# EAGLE board stestickers (EAGLE 6.3)
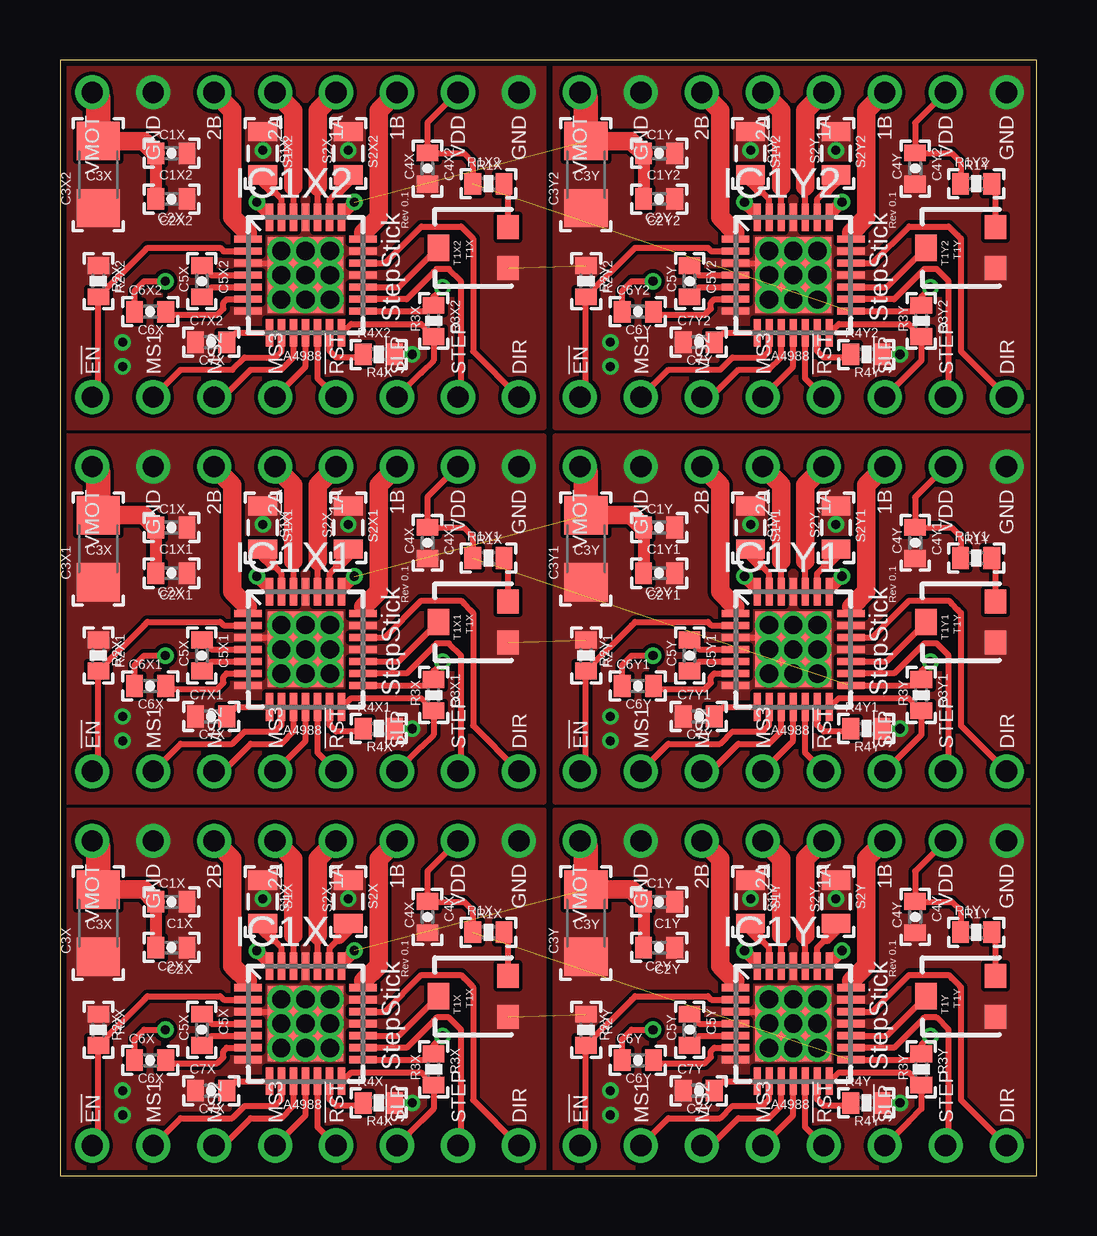
[diagram p0: board, top side]
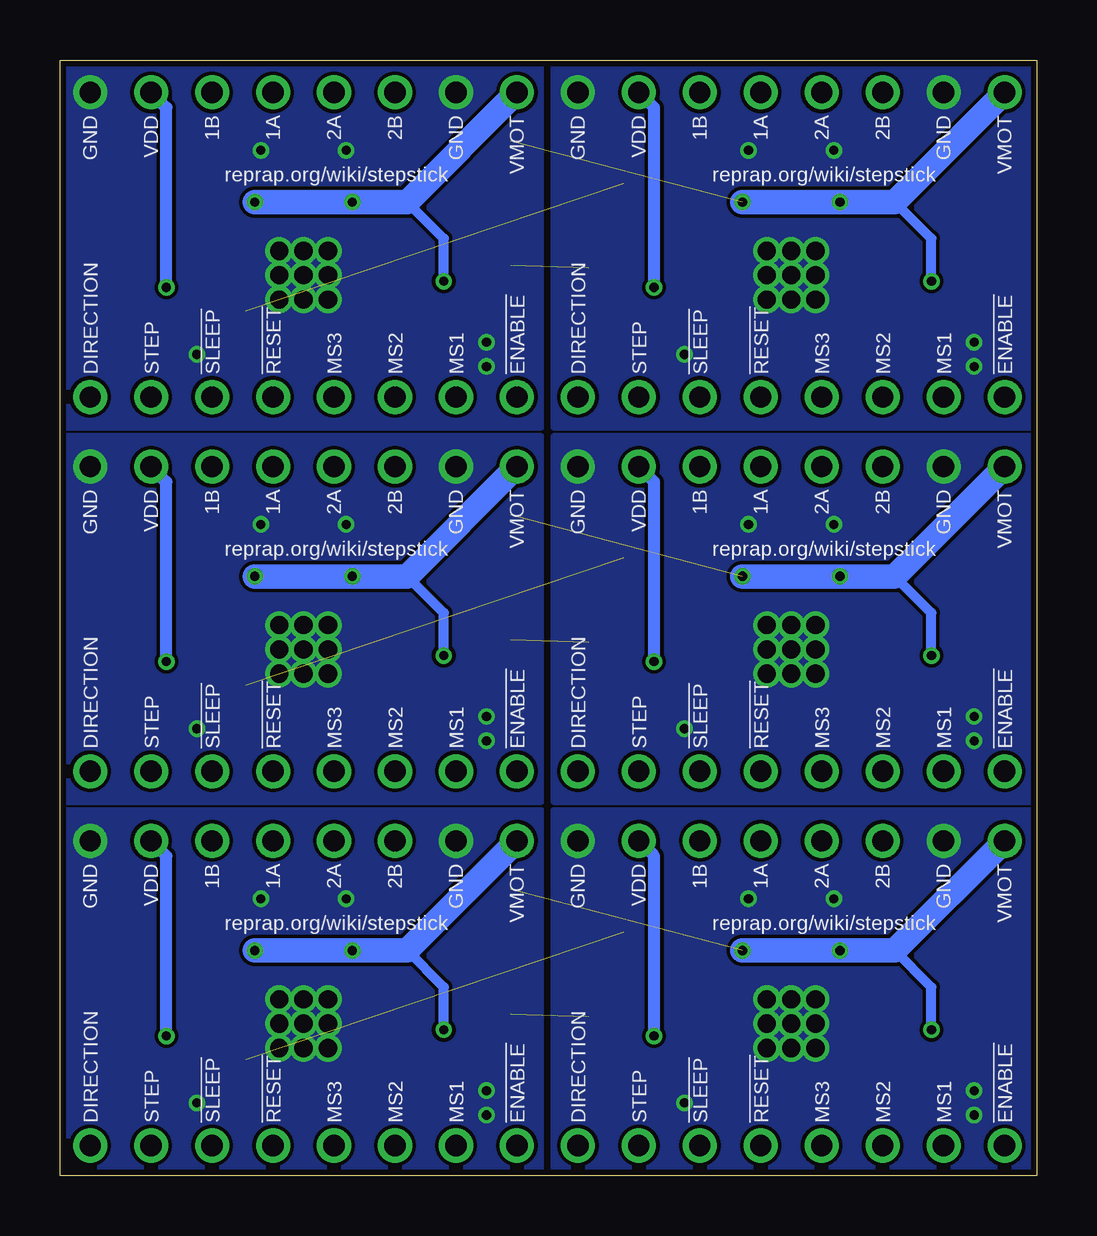
[diagram p1: board, bottom side, seen from below]

Size 40.7 x 46.5 mm. Coordinates in mm from the lower left corner, seen from the top.
Outline: 0,0 40.7,0 40.7,46.5 0,46.5 0,0
Copper layers (1*16): Top 0.035mm / dielectric 1.5mm / Bottom 0.035mm
Design rules "ITead_rule": minimum track width 6mil, minimum drill 12mil, track to track 6mil, track to pad 6mil, pad to pad 6mil, via to via 6mil, smd to smd 0mil, copper to edge 10mil, drill to drill 10mil, minimum pad ring 10mil, minimum via ring 6mil, stop-mask expansion 2mil, vias tented up to drill 100mil, thermal gap 10mil

## Footprints (pad centres in the part's own frame; a part is rotated, then mirrored left to right if it is on the bottom)
0402-CAP = smd 0.7 x 0.9: 1 -0.65,0; 2 0.65,0
1206 = smd 1.6 x 1.8: 1 -1.4,0; 2 1.4,0
QFN28ET = smd 1.15 x 0.3: 1 -2.4,1.5; 2 -2.4,1; 3 -2.4,0.5; 4 -2.4,0; 5 -2.4,-0.5; 6 -2.4,-1; 7 -2.4,-1.5; 15 2.4,-1.5; 16 2.4,-1; 17 2.4,-0.5; 18 2.4,0; 19 2.4,0.5; 20 2.4,1; 21 2.4,1.5 | smd 0.3 x 1.15: 8 -1.5,-2.4; 9 -1,-2.4; 10 -0.5,-2.4; 11 0,-2.4; 12 0.5,-2.4; 13 1,-2.4; 14 1.5,-2.4; 22 1.5,2.4; 23 1,2.4; 24 0.5,2.4; 25 0,2.4; 26 -0.5,2.4; 27 -1,2.4; 28 -1.5,2.4 | smd 3.15 x 3.15: EXP 0,0
CLONOLU = drill 0.889 pad 1.422: 1A 6.35,-1.27; 1B 6.35,-3.81; 2A 6.35,1.27; 2B 6.35,3.81; !EN -6.35,8.89; !RST -6.35,-1.27; !SLP -6.35,-3.81; DIR -6.35,-8.89; GND$1 6.35,6.35; GND$2 6.35,-8.89; MS1 -6.35,6.35; MS2 -6.35,3.81; MS3 -6.35,1.27; STEP -6.35,-6.35; VDD 6.35,-6.35; VMOT 6.35,8.89
0402-RES = smd 0.7 x 0.9: 1 -0.65,0; 2 0.65,0
0805 = smd 0.8 x 1.2: 1 -0.9,0; 2 0.9,0
TRIMPOT-3MM = smd 1 x 0.9: 1 -0.85,-1.45; 3 0.85,-1.45 | smd 1.1 x 0.9: 2 0,1.45

## Placement (x,y rotation side)
C1X  .1uf  [0402-CAP]  4.64,11.41 180 top
C1X1  .1uf  [0402-CAP]  4.64,27.01 180 top
C1X2  .1uf  [0402-CAP]  4.64,42.61 180 top
C1Y  .1uf  [0402-CAP]  24.96,11.41 180 top
C1Y1  .1uf  [0402-CAP]  24.96,27.01 180 top
C1Y2  .1uf  [0402-CAP]  24.96,42.61 180 top
C2X  .1uf  [0402-CAP]  4.64,9.51 180 top
C2X1  .1uf  [0402-CAP]  4.64,25.11 180 top
C2X2  .1uf  [0402-CAP]  4.64,40.7 180 top
C2Y  .1uf  [0402-CAP]  24.96,9.51 180 top
C2Y1  .1uf  [0402-CAP]  24.96,25.11 180 top
C2Y2  .1uf  [0402-CAP]  24.96,40.7 180 top
C3X  4.7uF  [1206]  1.6,10.52 90 top
C3X1  4.7uF  [1206]  1.6,26.12 90 top
C3X2  4.7uF  [1206]  1.6,41.72 90 top
C3Y  4.7uF  [1206]  21.92,10.52 90 top
C3Y1  4.7uF  [1206]  21.92,26.12 90 top
C3Y2  4.7uF  [1206]  21.92,41.72 90 top
C4X  .22uf  [0402-CAP]  15.31,10.78 270 top
C4X1  .22uf  [0402-CAP]  15.31,26.38 270 top
C4X2  .22uf  [0402-CAP]  15.31,41.98 270 top
C4Y  .22uf  [0402-CAP]  35.63,10.78 270 top
C4Y1  .22uf  [0402-CAP]  35.63,26.38 270 top
C4Y2  .22uf  [0402-CAP]  35.63,41.98 270 top
C5X  .1uf  [0402-CAP]  5.91,6.08 270 top
C5X1  .1uf  [0402-CAP]  5.91,21.68 270 top
C5X2  .1uf  [0402-CAP]  5.91,37.28 270 top
C5Y  .1uf  [0402-CAP]  26.23,6.08 270 top
C5Y1  .1uf  [0402-CAP]  26.23,21.68 270 top
C5Y2  .1uf  [0402-CAP]  26.23,37.28 270 top
C6X  .1uf  [0402-CAP]  3.76,4.81 0 top
C6X1  .1uf  [0402-CAP]  3.76,20.41 0 top
C6X2  .1uf  [0402-CAP]  3.76,36.01 0 top
C6Y  .1uf  [0402-CAP]  24.07,4.81 0 top
C6Y1  .1uf  [0402-CAP]  24.07,20.41 0 top
C6Y2  .1uf  [0402-CAP]  24.07,36.01 0 top
C7X  .22uf  [0402-CAP]  6.29,3.54 0 top
C7X1  .22uf  [0402-CAP]  6.29,19.14 0 top
C7X2  .22uf  [0402-CAP]  6.29,34.74 0 top
C7Y  .22uf  [0402-CAP]  26.61,3.54 0 top
C7Y1  .22uf  [0402-CAP]  26.61,19.14 0 top
C7Y2  .22uf  [0402-CAP]  26.61,34.74 0 top
IC1X  A4988  [QFN28ET]  10.23,6.33 0 top
IC1X1  A4988  [QFN28ET]  10.23,21.93 0 top
IC1X2  A4988  [QFN28ET]  10.23,37.53 0 top
IC1Y  A4988  [QFN28ET]  30.55,6.33 0 top
IC1Y1  A4988  [QFN28ET]  30.55,21.93 0 top
IC1Y2  A4988  [QFN28ET]  30.55,37.53 0 top
J1X  CLONOLU  [CLONOLU]  10.23,7.6 90 top
J1X1  CLONOLU  [CLONOLU]  10.23,23.2 90 top
J1X2  CLONOLU  [CLONOLU]  10.23,38.8 90 top
J1Y  CLONOLU  [CLONOLU]  30.55,7.6 90 top
J1Y1  CLONOLU  [CLONOLU]  30.55,23.2 90 top
J1Y2  CLONOLU  [CLONOLU]  30.55,38.8 90 top
R1X  20k  [0402-RES]  17.85,10.14 0 top
R1X1  20k  [0402-RES]  17.85,25.74 0 top
R1X2  20k  [0402-RES]  17.85,41.34 0 top
R1Y  20k  [0402-RES]  38.17,10.14 0 top
R1Y1  20k  [0402-RES]  38.17,25.74 0 top
R1Y2  20k  [0402-RES]  38.17,41.34 0 top
R2X  100k  [0402-RES]  1.6,6.08 270 top
R2X1  100k  [0402-RES]  1.6,21.68 270 top
R2X2  100k  [0402-RES]  1.6,37.28 270 top
R2Y  100k  [0402-RES]  21.92,6.08 270 top
R2Y1  100k  [0402-RES]  21.92,21.68 270 top
R2Y2  100k  [0402-RES]  21.92,37.28 270 top
R3X  100k  [0402-RES]  15.57,4.42 270 top
R3X1  100k  [0402-RES]  15.57,20.02 270 top
R3X2  100k  [0402-RES]  15.57,35.62 270 top
R3Y  100k  [0402-RES]  35.89,4.42 270 top
R3Y1  100k  [0402-RES]  35.89,20.02 270 top
R3Y2  100k  [0402-RES]  35.89,35.62 270 top
R4X  10k  [0402-RES]  13.28,3.03 0 top
R4X1  10k  [0402-RES]  13.28,18.63 0 top
R4X2  10k  [0402-RES]  13.28,34.23 0 top
R4Y  10k  [0402-RES]  33.6,3.03 0 top
R4Y1  10k  [0402-RES]  33.6,18.63 0 top
R4Y2  10k  [0402-RES]  33.6,34.23 0 top
S1X  0.2  [0805]  8.45,11.41 270 top
S1X1  0.2  [0805]  8.45,27.01 270 top
S1X2  0.2  [0805]  8.45,42.61 270 top
S1Y  0.2  [0805]  28.77,11.41 270 top
S1Y1  0.2  [0805]  28.77,27.01 270 top
S1Y2  0.2  [0805]  28.77,42.61 270 top
S2X  0.2  [0805]  12.01,11.41 270 top
S2X1  0.2  [0805]  12.01,27.01 270 top
S2X2  0.2  [0805]  12.01,42.61 270 top
S2Y  0.2  [0805]  32.33,11.41 270 top
S2Y1  0.2  [0805]  32.33,27.01 270 top
S2Y2  0.2  [0805]  32.33,42.61 270 top
T1X  TRIM  [TRIMPOT-3MM]  17.22,7.47 90 top
T1X1  TRIM  [TRIMPOT-3MM]  17.22,23.07 90 top
T1X2  TRIM  [TRIMPOT-3MM]  17.22,38.67 90 top
T1Y  TRIM  [TRIMPOT-3MM]  37.54,7.47 90 top
T1Y1  TRIM  [TRIMPOT-3MM]  37.54,23.07 90 top
T1Y2  TRIM  [TRIMPOT-3MM]  37.54,38.67 90 top

## Library data of the parts
C1X C1X1 C1X2 C1Y C1Y1 C1Y2 C2X C2X1 C2X2 C2Y C2Y1 C2Y2 C3X C3X1 C3X2 C3Y C3Y1 C3Y2 C4X C4X1 C4X2 C4Y C4Y1 C4Y2 C5X C5X1 C5X2 C5Y C5Y1 C5Y2 C6X C6X1 C6X2 C6Y C6Y1 C6Y2 C7X C7X1 C7X2 C7Y C7Y1 C7Y2 R1X R1X1 R1X2 R1Y R1Y1 R1Y2 R2X R2X1 R2X2 R2Y R2Y1 R2Y2 R3X R3X1 R3X2 R3Y R3Y1 R3Y2 R4X R4X1 R4X2 R4Y R4Y1 R4Y2 S1X S1X1 S1X2 S1Y S1Y1 S1Y2 S2X S2X1 S2X2 S2Y S2Y1 S2Y2 T1X T1X1 T1X2 T1Y T1Y1 T1Y2 = SparkFun
IC1X IC1X1 IC1X2 IC1Y IC1Y1 IC1Y2 = allegro; MPN: A4983SETTR-T; OC_FARNELL: 1688956; OC_NEWARK: 39M6763
J1X J1X1 J1X2 J1Y J1Y1 J1Y2 = pololu-allegro

## Nets
GND: C1X.1 C1Y.1 C2X.1 C2Y.1 C3X.1 C3Y.1 C4X.2 C4Y.2 C7X.1 C7Y.1 IC1X.3 IC1X.7 IC1X.18 IC1X.20 IC1X.25 IC1X.EXP IC1Y.3 IC1Y.7 IC1Y.18 IC1Y.20 IC1Y.25 IC1Y.EXP J1X.GND$1 J1X.GND$2 J1Y.GND$1 J1Y.GND$2 R2X.1 R2Y.1 R4X.2 R4Y.2 S1X.1 S1Y.1 S2X.1 S2Y.1 T1X.1 T1Y.1
GND1: C1X1.1 C1Y1.1 C2X1.1 C2Y1.1 C3X1.1 C3Y1.1 C4X1.2 C4Y1.2 C7X1.1 C7Y1.1 IC1X1.3 IC1X1.7 IC1X1.18 IC1X1.20 IC1X1.25 IC1X1.EXP IC1Y1.3 IC1Y1.7 IC1Y1.18 IC1Y1.20 IC1Y1.25 IC1Y1.EXP J1X1.GND$1 J1X1.GND$2 J1Y1.GND$1 J1Y1.GND$2 R2X1.1 R2Y1.1 R4X1.2 R4Y1.2 S1X1.1 S1Y1.1 S2X1.1 S2Y1.1 T1X1.1 T1Y1.1
GND2: C1X2.1 C1Y2.1 C2X2.1 C2Y2.1 C3X2.1 C3Y2.1 C4X2.2 C4Y2.2 C7X2.1 C7Y2.1 IC1X2.3 IC1X2.7 IC1X2.18 IC1X2.20 IC1X2.25 IC1X2.EXP IC1Y2.3 IC1Y2.7 IC1Y2.18 IC1Y2.20 IC1Y2.25 IC1Y2.EXP J1X2.GND$1 J1X2.GND$2 J1Y2.GND$1 J1Y2.GND$2 R2X2.1 R2Y2.1 R4X2.2 R4Y2.2 S1X2.1 S1Y2.1 S2X2.1 S2Y2.1 T1X2.1 T1Y2.1
VDD: C4X.1 C4Y.1 IC1X.15 IC1Y.15 J1X.VDD J1Y.VDD R1X.1 R1Y.1 R3X.1 R3Y.1
VDD1: C4X1.1 C4Y1.1 IC1X1.15 IC1Y1.15 J1X1.VDD J1Y1.VDD R1X1.1 R1Y1.1 R3X1.1 R3Y1.1
VDD2: C4X2.1 C4Y2.1 IC1X2.15 IC1Y2.15 J1X2.VDD J1Y2.VDD R1X2.1 R1Y2.1 R3X2.1 R3Y2.1
VMOT: C1X.2 C1Y.2 C2X.2 C2Y.2 C3X.2 C3Y.2 C6X.1 C6Y.1 IC1X.22 IC1X.28 IC1Y.22 IC1Y.28 J1X.VMOT J1Y.VMOT
VMOT1: C1X1.2 C1Y1.2 C2X1.2 C2Y1.2 C3X1.2 C3Y1.2 C6X1.1 C6Y1.1 IC1X1.22 IC1X1.28 IC1Y1.22 IC1Y1.28 J1X1.VMOT J1Y1.VMOT
VMOT2: C1X2.2 C1Y2.2 C2X2.2 C2Y2.2 C3X2.2 C3Y2.2 C6X2.1 C6Y2.1 IC1X2.22 IC1X2.28 IC1Y2.22 IC1Y2.28 J1X2.VMOT J1Y2.VMOT
XCP1: C5X.1 IC1X.4
XCP2: C5X.2 IC1X.5
XCP3: C5X1.1 IC1X1.4
XCP4: C5X1.2 IC1X1.5
XCP5: C5X2.1 IC1X2.4
XCP6: C5X2.2 IC1X2.5
XDIR: IC1X.19 J1X.DIR
XDIR1: IC1X1.19 J1X1.DIR
XDIR2: IC1X2.19 J1X2.DIR
XENABLE: IC1X.2 J1X.!EN R2X.2
XENABLE1: IC1X1.2 J1X1.!EN R2X1.2
XENABLE2: IC1X2.2 J1X2.!EN R2X2.2
XMS1: IC1X.9 J1X.MS1
XMS2: IC1X.10 J1X.MS2
XMS3: IC1X.11 J1X.MS3
XMS4: IC1X1.9 J1X1.MS1
XMS5: IC1X1.10 J1X1.MS2
XMS6: IC1X1.11 J1X1.MS3
XMS7: IC1X2.9 J1X2.MS1
XMS8: IC1X2.10 J1X2.MS2
XMS9: IC1X2.11 J1X2.MS3
XOUT1A: IC1X.24 J1X.1A
XOUT1A1: IC1X1.24 J1X1.1A
XOUT1A2: IC1X2.24 J1X2.1A
XOUT1B: IC1X.21 J1X.1B
XOUT1B1: IC1X1.21 J1X1.1B
XOUT1B2: IC1X2.21 J1X2.1B
XOUT2A: IC1X.26 J1X.2A
XOUT2A1: IC1X1.26 J1X1.2A
XOUT2A2: IC1X2.26 J1X2.2A
XOUT2B: IC1X.1 J1X.2B
XOUT2B1: IC1Y.1 J1Y.2B
XOUT2B2: IC1X1.1 J1X1.2B
XOUT2B3: IC1Y1.1 J1Y1.2B
XOUT2B4: IC1X2.1 J1X2.2B
XOUT2B5: IC1Y2.1 J1Y2.2B
XREF: IC1X.17 T1X.2
XREF1: IC1X1.17 T1X1.2
XREF2: R1X.2 T1X.3
XREF3: R1X1.2 T1X1.3
XREF4: IC1X2.17 T1X2.2
XREF5: R1X2.2 T1X2.3
XRESET: IC1X.12 J1X.!RST
XRESET1: IC1X1.12 J1X1.!RST
XRESET2: IC1X2.12 J1X2.!RST
XROSC: IC1X.13 R4X.1
XROSC1: IC1X1.13 R4X1.1
XROSC2: IC1X2.13 R4X2.1
XSENSE1: IC1X.23 S2X.2
XSENSE2: IC1X.27 S1X.2
XSENSE3: IC1X1.27 S1X1.2
XSENSE4: IC1X1.23 S2X1.2
XSENSE5: IC1X2.27 S1X2.2
XSENSE6: IC1X2.23 S2X2.2
XSLEEP: IC1X.14 J1X.!SLP R3X.2
XSLEEP1: IC1X1.14 J1X1.!SLP R3X1.2
XSLEEP2: IC1X2.14 J1X2.!SLP R3X2.2
XSTEP: IC1X.16 J1X.STEP
XSTEP1: IC1X1.16 J1X1.STEP
XSTEP2: IC1X2.16 J1X2.STEP
XVCP: C6X.2 IC1X.6
XVCP1: C6X1.2 IC1X1.6
XVCP2: C6X2.2 IC1X2.6
XVREG: C7X.2 IC1X.8
XVREG1: C7X1.2 IC1X1.8
XVREG2: C7X2.2 IC1X2.8
YCP1: C5Y.1 IC1Y.4
YCP2: C5Y.2 IC1Y.5
YCP3: C5Y1.1 IC1Y1.4
YCP4: C5Y1.2 IC1Y1.5
YCP5: C5Y2.1 IC1Y2.4
YCP6: C5Y2.2 IC1Y2.5
YDIR1: IC1Y.19 J1Y.DIR
YDIR2: IC1Y1.19 J1Y1.DIR
YDIR3: IC1Y2.19 J1Y2.DIR
YENABLE: IC1Y.2 J1Y.!EN R2Y.2
YENABLE1: IC1Y1.2 J1Y1.!EN R2Y1.2
YENABLE2: IC1Y2.2 J1Y2.!EN R2Y2.2
YMS1: IC1Y.9 J1Y.MS1
YMS2: IC1Y.10 J1Y.MS2
YMS3: IC1Y.11 J1Y.MS3
YMS4: IC1Y1.9 J1Y1.MS1
YMS5: IC1Y1.10 J1Y1.MS2
YMS6: IC1Y1.11 J1Y1.MS3
YMS7: IC1Y2.9 J1Y2.MS1
YMS8: IC1Y2.10 J1Y2.MS2
YMS9: IC1Y2.11 J1Y2.MS3
YOUT1A: IC1Y.24 J1Y.1A
YOUT1A1: IC1Y1.24 J1Y1.1A
YOUT1A2: IC1Y2.24 J1Y2.1A
YOUT1B: IC1Y.21 J1Y.1B
YOUT1B1: IC1Y1.21 J1Y1.1B
YOUT1B2: IC1Y2.21 J1Y2.1B
YOUT2A: IC1Y.26 J1Y.2A
YOUT2A1: IC1Y1.26 J1Y1.2A
YOUT2A2: IC1Y2.26 J1Y2.2A
YREF: IC1Y.17 T1Y.2
YREF1: R1Y.2 T1Y.3
YREF2: IC1Y1.17 T1Y1.2
YREF3: R1Y1.2 T1Y1.3
YREF4: IC1Y2.17 T1Y2.2
YREF5: R1Y2.2 T1Y2.3
YRESET: IC1Y.12 J1Y.!RST
YRESET1: IC1Y1.12 J1Y1.!RST
YRESET2: IC1Y2.12 J1Y2.!RST
YROSC: IC1Y.13 R4Y.1
YROSC1: IC1Y1.13 R4Y1.1
YROSC2: IC1Y2.13 R4Y2.1
YSENSE1: IC1Y.23 S2Y.2
YSENSE2: IC1Y.27 S1Y.2
YSENSE3: IC1Y1.27 S1Y1.2
YSENSE4: IC1Y1.23 S2Y1.2
YSENSE5: IC1Y2.27 S1Y2.2
YSENSE6: IC1Y2.23 S2Y2.2
YSLEEP: IC1Y.14 J1Y.!SLP R3Y.2
YSLEEP1: IC1Y1.14 J1Y1.!SLP R3Y1.2
YSLEEP2: IC1Y2.14 J1Y2.!SLP R3Y2.2
YSTEP: IC1Y.16 J1Y.STEP
YSTEP1: IC1Y1.16 J1Y1.STEP
YSTEP2: IC1Y2.16 J1Y2.STEP
YVCP: C6Y.2 IC1Y.6
YVCP1: C6Y1.2 IC1Y1.6
YVCP2: C6Y2.2 IC1Y2.6
YVREG: C7Y.2 IC1Y.8
YVREG1: C7Y1.2 IC1Y1.8
YVREG2: C7Y2.2 IC1Y2.8

## Tracks (layer width: path | path; a pad name or v marks a point on that pad's centre or on a via)
GND  (via drill 0.38, 0.76)  (1 unrouted)
  Top 0.254: IC1X.3 8.72,6.83 arc-90 v9.22,6.33 | IC1Y.3 29.04,6.83 arc-90 v29.54,6.33
  other vias: 8.45,11.54 12.01,11.54 10.23,7.35 9.22,7.35 11.25,7.35 11.25,5.31 9.22,5.31 10.23,6.33 11.25,6.33 10.23,5.31 14.68,3.03 2.61,2.52 28.77,11.54 32.33,11.54 30.55,7.35 29.54,7.35 31.57,7.35 31.57,5.31 29.54,5.31 30.55,6.33 31.57,6.33 30.55,5.31 35,3.03 2.61,3.54 22.93,2.52 22.93,3.54
  pour Top (rank 6, no thermals): 0.07,15.22 20.14,15.22 20.14,-0.02 0.07,-0.02
  pour Top (rank 6, no thermals): 20.65,15.22 40.46,15.22 40.46,-0.02 20.65,-0.02
  pour Bottom (rank 6, no thermals): 0.07,15.22 20.14,15.22 20.14,-0.02 0.07,-0.02
  pour Bottom (rank 6, no thermals): 20.65,15.22 40.46,15.22 40.46,-0.02 20.65,-0.02
GND1  (via drill 0.38, 0.76)  (1 unrouted)
  Top 0.254: IC1X1.3 8.72,22.43 arc-90 v9.22,21.93 | IC1Y1.3 29.04,22.43 arc-90 v29.54,21.93
  other vias: 8.45,27.14 12.01,27.14 10.23,22.95 9.22,22.95 11.25,22.95 11.25,20.91 9.22,20.91 10.23,21.93 11.25,21.93 10.23,20.91 14.68,18.63 2.61,18.12 28.77,27.14 32.33,27.14 30.55,22.95 29.54,22.95 31.57,22.95 31.57,20.91 29.54,20.91 30.55,21.93 31.57,21.93 30.55,20.91 35,18.63 2.61,19.14 22.93,18.12 22.93,19.14
  pour Top (rank 6, no thermals): 0.07,30.82 20.14,30.82 20.14,15.58 0.07,15.58
  pour Top (rank 6, no thermals): 20.65,30.82 40.46,30.82 40.46,15.58 20.65,15.58
  pour Bottom (rank 6, no thermals): 0.07,30.82 20.14,30.82 20.14,15.58 0.07,15.58
  pour Bottom (rank 6, no thermals): 20.65,30.82 40.46,30.82 40.46,15.58 20.65,15.58
GND2  (via drill 0.38, 0.76)  (1 unrouted)
  Top 0.254: IC1X2.3 8.72,38.03 arc-90 v9.22,37.53 | IC1Y2.3 29.04,38.03 arc-90 v29.54,37.53
  other vias: 8.45,42.74 12.01,42.74 10.23,38.55 9.22,38.55 11.25,38.55 11.25,36.51 9.22,36.51 10.23,37.53 11.25,37.53 10.23,36.51 14.68,34.23 2.61,33.72 28.77,42.74 32.33,42.74 30.55,38.55 29.54,38.55 31.57,38.55 31.57,36.51 29.54,36.51 30.55,37.53 31.57,37.53 30.55,36.51 35,34.23 2.61,34.74 22.93,33.72 22.93,34.74
  pour Top (rank 6, no thermals): 0.07,46.42 20.14,46.42 20.14,31.18 0.07,31.18
  pour Top (rank 6, no thermals): 20.65,46.42 40.46,46.42 40.46,31.18 20.65,31.18
  pour Bottom (rank 6, no thermals): 0.07,46.42 20.14,46.42 20.14,31.18 0.07,31.18
  pour Bottom (rank 6, no thermals): 20.65,46.42 40.46,46.42 40.46,31.18 20.65,31.18
VDD  (via drill 0.38)  (1 unrouted)
  Top 0.254: IC1X.15 15.32,4.83 R3X.1 15.57,5.44 v15.95,5.82 | R1X.1 17.2,11.04 16.84,11.41 15.33,11.41 C4X.1 15.31,12.68 J1X.VDD | IC1Y.15 35.64,4.83 R3Y.1 35.89,5.44 v36.27,5.82 | R1Y.1 37.52,11.04 37.16,11.41 35.65,11.41 C4Y.1 35.63,12.68 J1Y.VDD
  Bottom 0.508: v15.95,5.82 15.95,13.31 J1X.VDD | v36.27,5.82 36.27,13.31 J1Y.VDD
VDD1  (via drill 0.38)  (1 unrouted)
  Top 0.254: IC1X1.15 15.32,20.43 R3X1.1 15.57,21.04 v15.95,21.42 | R1X1.1 17.2,26.64 16.84,27.01 15.33,27.01 C4X1.1 15.31,28.28 J1X1.VDD | IC1Y1.15 35.64,20.43 R3Y1.1 35.89,21.04 v36.27,21.42 | R1Y1.1 37.52,26.64 37.16,27.01 35.65,27.01 C4Y1.1 35.63,28.28 J1Y1.VDD
  Bottom 0.508: v15.95,21.42 15.95,28.91 J1X1.VDD | v36.27,21.42 36.27,28.91 J1Y1.VDD
VDD2  (via drill 0.38)  (1 unrouted)
  Top 0.254: IC1X2.15 15.32,36.03 R3X2.1 15.57,36.64 v15.95,37.02 | R1X2.1 17.2,42.24 16.84,42.61 15.33,42.61 C4X2.1 15.31,43.88 J1X2.VDD | IC1Y2.15 35.64,36.03 R3Y2.1 35.89,36.64 v36.27,37.02 | R1Y2.1 37.52,42.24 37.16,42.61 35.65,42.61 C4Y2.1 35.63,43.88 J1Y2.VDD
  Bottom 0.508: v15.95,37.02 15.95,44.52 J1X2.VDD | v36.27,37.02 36.27,44.52 J1Y2.VDD
VMOT  (via drill 0.38)  (1 unrouted)
  Top 0.254: 8.58,9 8.72,8.74 IC1X.28 | 11.88,9 11.75,8.74 IC1X.22 | C6X.1 3.1,5.68 3.5,6.08 v4.39,6.08 | 28.9,9 29.04,8.74 IC1Y.28 | 32.2,9 32.06,8.74 IC1Y.22 | C6Y.1 23.42,5.68 23.82,6.08 v24.71,6.08
  Top 0.508: v8.2,9.38 8.58,9 | v12.26,9.38 11.88,9 | C1X.2 C2X.2 4.01,9.49 | v28.52,9.38 28.9,9 | v32.58,9.38 32.2,9 | C1Y.2 C2Y.2 24.33,9.49
  Top 0.762: C1X.2 3.48,11.92 C3X.2 | C1Y.2 23.8,11.92 C3Y.2
  Top 1.016: C3Y.2 21.92,13.7 J1Y.VMOT | C3X.2 1.6,13.7 J1X.VMOT
  Bottom 0.406: v4.39,6.08 4.39,7.85 5.91,9.38 | v24.71,6.08 24.71,7.85 26.23,9.38
  Bottom 1.016: v12.26,9.38 v8.2,9.38 5.91,9.38 J1X.VMOT | v32.58,9.38 v28.52,9.38 26.23,9.38 J1Y.VMOT
VMOT1  (via drill 0.38)  (1 unrouted)
  Top 0.254: 8.58,24.6 8.72,24.34 IC1X1.28 | 11.88,24.6 11.75,24.34 IC1X1.22 | C6X1.1 3.1,21.28 3.5,21.68 v4.39,21.68 | 28.9,24.6 29.04,24.34 IC1Y1.28 | 32.2,24.6 32.06,24.34 IC1Y1.22 | C6Y1.1 23.42,21.28 23.82,21.68 v24.71,21.68
  Top 0.508: v8.2,24.98 8.58,24.6 | v12.26,24.98 11.88,24.6 | C1X1.2 C2X1.2 4.01,25.09 | v28.52,24.98 28.9,24.6 | v32.58,24.98 32.2,24.6 | C1Y1.2 C2Y1.2 24.33,25.09
  Top 0.762: C1X1.2 3.48,27.52 C3X1.2 | C1Y1.2 23.8,27.52 C3Y1.2
  Top 1.016: C3Y1.2 21.92,29.3 J1Y1.VMOT | C3X1.2 1.6,29.3 J1X1.VMOT
  Bottom 0.406: v4.39,21.68 4.39,23.45 5.91,24.98 | v24.71,21.68 24.71,23.45 26.23,24.98
  Bottom 1.016: v12.26,24.98 v8.2,24.98 5.91,24.98 J1X1.VMOT | v32.58,24.98 v28.52,24.98 26.23,24.98 J1Y1.VMOT
VMOT2  (via drill 0.38)  (1 unrouted)
  Top 0.254: 8.58,40.2 8.72,39.94 IC1X2.28 | 11.88,40.2 11.75,39.94 IC1X2.22 | C6X2.1 3.1,36.88 3.5,37.28 v4.39,37.28 | 28.9,40.2 29.04,39.94 IC1Y2.28 | 32.2,40.2 32.06,39.94 IC1Y2.22 | C6Y2.1 23.42,36.88 23.82,37.28 v24.71,37.28
  Top 0.508: v8.2,40.58 8.58,40.2 | v12.26,40.58 11.88,40.2 | C1X2.2 C2X2.2 4.01,40.69 | v28.52,40.58 28.9,40.2 | v32.58,40.58 32.2,40.2 | C1Y2.2 C2Y2.2 24.33,40.69
  Top 0.762: C1X2.2 3.48,43.12 C3X2.2 | C1Y2.2 23.8,43.12 C3Y2.2
  Top 1.016: C3Y2.2 21.92,44.9 J1Y2.VMOT | C3X2.2 1.6,44.9 J1X2.VMOT
  Bottom 0.406: v4.39,37.28 4.39,39.05 5.91,40.58 | v24.71,37.28 24.71,39.05 26.23,40.58
  Bottom 1.016: v12.26,40.58 v8.2,40.58 5.91,40.58 J1X2.VMOT | v32.58,40.58 v28.52,40.58 26.23,40.58 J1Y2.VMOT
XCP1
  Top 0.254: IC1X.4 6.31,6.33 C5X.1
XCP2
  Top 0.254: IC1X.5 6.94,5.83 6.93,5.82 6.31,5.82 C5X.2
XCP3
  Top 0.254: IC1X1.4 6.31,21.93 C5X1.1
XCP4
  Top 0.254: IC1X1.5 6.94,21.43 6.93,21.42 6.31,21.42 C5X1.2
XCP5
  Top 0.254: IC1X2.4 6.31,37.53 C5X2.1
XCP6
  Top 0.254: IC1X2.5 6.94,37.03 6.93,37.02 6.31,37.02 C5X2.2
XDIR
  Top 0.254: IC1X.19 13.53,6.83 15.06,8.36 16.71,8.36 16.84,8.23 17.09,7.98 17.22,7.85 17.22,3.15 J1X.DIR
XDIR1
  Top 0.254: IC1X1.19 13.53,22.43 15.06,23.96 16.71,23.96 16.84,23.84 17.09,23.58 17.22,23.45 17.22,18.75 J1X1.DIR
XDIR2
  Top 0.254: IC1X2.19 13.53,38.03 15.06,39.56 16.71,39.56 16.84,39.44 17.09,39.18 17.22,39.05 17.22,34.35 J1X2.DIR
XENABLE
  Top 0.254: J1X.!EN 1.6,1.5 R2X.2 3.5,7.33 3.64,7.47 6.68,7.47 6.82,7.33 IC1X.2
XENABLE1
  Top 0.254: J1X1.!EN 1.6,17.1 R2X1.2 3.5,22.93 3.64,23.07 6.68,23.07 6.82,22.93 IC1X1.2
XENABLE2
  Top 0.254: J1X2.!EN 1.6,32.7 R2X2.2 3.5,38.53 3.64,38.67 6.68,38.67 6.82,38.53 IC1X2.2
XMS1
  Top 0.254: IC1X.9 9.23,3.17 8.96,2.9 7.69,2.9 7.18,2.39 5.03,2.39 J1X.MS1
XMS2
  Top 0.254: J1X.MS2 6.8,1.25 7.95,2.39 9.22,2.39 9.72,2.9 9.73,2.91 IC1X.10
XMS3
  Top 0.254: J1X.MS3 10.23,2.52 IC1X.11
XMS4
  Top 0.254: IC1X1.9 9.23,18.77 8.96,18.5 7.69,18.5 7.18,17.99 5.03,17.99 J1X1.MS1
XMS5
  Top 0.254: J1X1.MS2 6.8,16.85 7.95,17.99 9.22,17.99 9.72,18.5 9.73,18.51 IC1X1.10
XMS6
  Top 0.254: J1X1.MS3 10.23,18.12 IC1X1.11
XMS7
  Top 0.254: IC1X2.9 9.23,34.37 8.96,34.1 7.69,34.1 7.18,33.59 5.03,33.59 J1X2.MS1
XMS8
  Top 0.254: J1X2.MS2 6.8,32.45 7.95,33.59 9.22,33.59 9.72,34.1 9.73,34.11 IC1X2.10
XMS9
  Top 0.254: J1X2.MS3 10.23,33.72 IC1X2.11
XOUT1A
  Top 0.254: IC1X.24 10.73,9.88 10.74,10.01
  Top 0.762: J1X.1A 10.74,13.19 10.74,10.01
XOUT1A1
  Top 0.254: IC1X1.24 10.73,25.48 10.74,25.61
  Top 0.762: J1X1.1A 10.74,28.79 10.74,25.61
XOUT1A2
  Top 0.254: IC1X2.24 10.73,41.08 10.74,41.21
  Top 0.762: J1X2.1A 10.74,44.39 10.74,41.21
XOUT1B
  Top 0.254: 12.64,8.11 12.64,7.84 IC1X.21
  Top 0.762: J1X.1B 13.28,13.19 13.28,8.74 12.64,8.11
XOUT1B1
  Top 0.254: 12.64,23.71 12.64,23.44 IC1X1.21
  Top 0.762: J1X1.1B 13.28,28.79 13.28,24.34 12.64,23.71
XOUT1B2
  Top 0.254: 12.64,39.31 12.64,39.04 IC1X2.21
  Top 0.762: J1X2.1B 13.28,44.39 13.28,39.94 12.64,39.31
XOUT2A
  Top 0.254: IC1X.26 9.73,9.88 9.72,10.01
  Top 0.762: J1X.2A 9.72,13.19 9.72,10.01
XOUT2A1
  Top 0.254: IC1X1.26 9.73,25.48 9.72,25.61
  Top 0.762: J1X1.2A 9.72,28.79 9.72,25.61
XOUT2A2
  Top 0.254: IC1X2.26 9.73,41.08 9.72,41.21
  Top 0.762: J1X2.2A 9.72,44.39 9.72,41.21
XOUT2B
  Top 0.254: 7.82,8.11 7.82,7.84 IC1X.1
  Top 0.762: J1X.2B 7.18,13.19 7.18,8.74 7.82,8.11
XOUT2B1
  Top 0.254: 28.14,8.11 28.14,7.84 IC1Y.1
  Top 0.762: J1Y.2B 27.5,13.19 27.5,8.74 28.14,8.11
XOUT2B2
  Top 0.254: 7.82,23.71 7.82,23.44 IC1X1.1
  Top 0.762: J1X1.2B 7.18,28.79 7.18,24.34 7.82,23.71
XOUT2B3
  Top 0.254: 28.14,23.71 28.14,23.44 IC1Y1.1
  Top 0.762: J1Y1.2B 27.5,28.79 27.5,24.34 28.14,23.71
XOUT2B4
  Top 0.254: 7.82,39.31 7.82,39.04 IC1X2.1
  Top 0.762: J1X2.2B 7.18,44.39 7.18,39.94 7.82,39.31
XOUT2B5
  Top 0.254: 28.14,39.31 28.14,39.04 IC1Y2.1
  Top 0.762: J1Y2.2B 27.5,44.39 27.5,39.94 28.14,39.31
XREF
  Top 0.254: IC1X.17 14.12,5.83 T1X.2
XREF1
  Top 0.254: IC1X1.17 14.12,21.43 T1X1.2
XREF2
  Top 0.254: T1X.3 18.67,9.97 R1X.2
XREF3
  Top 0.254: T1X1.3 18.67,25.57 R1X1.2
XREF4
  Top 0.254: IC1X2.17 14.12,37.03 T1X2.2
XREF5
  Top 0.254: T1X2.3 18.67,41.17 R1X2.2
XRESET
  Top 0.254: J1X.!RST 10.73,2.02 IC1X.12
XRESET1
  Top 0.254: J1X1.!RST 10.73,17.62 IC1X1.12
XRESET2
  Top 0.254: J1X2.!RST 10.73,33.22 IC1X2.12
XROSC
  Top 0.254: IC1X.13 11.23,3.17 11.5,2.9 12.5,2.9 R4X.1
XROSC1
  Top 0.254: IC1X1.13 11.23,18.77 11.5,18.5 12.5,18.5 R4X1.1
XROSC2
  Top 0.254: IC1X2.13 11.23,34.37 11.5,34.1 12.5,34.1 R4X2.1
XSENSE1
  Top 0.254: IC1X.23 11.23,9.49 11.63,9.89
  Top 0.508: 11.63,9.89 12.01,10.27 S2X.2
XSENSE2
  Top 0.254: IC1X.27 9.23,9.49 8.84,9.89
  Top 0.508: 8.84,9.89 8.45,10.27 S1X.2
XSENSE3
  Top 0.254: IC1X1.27 9.23,25.09 8.84,25.49
  Top 0.508: 8.84,25.49 8.45,25.87 S1X1.2
XSENSE4
  Top 0.254: IC1X1.23 11.23,25.09 11.63,25.49
  Top 0.508: 11.63,25.49 12.01,25.87 S2X1.2
XSENSE5
  Top 0.254: IC1X2.27 9.23,40.69 8.84,41.09
  Top 0.508: 8.84,41.09 8.45,41.47 S1X2.2
XSENSE6
  Top 0.254: IC1X2.23 11.23,40.69 11.63,41.09
  Top 0.508: 11.63,41.09 12.01,41.47 S2X2.2
XSLEEP
  Top 0.254: J1X.!SLP 15.06,2.27 15.57,2.77 R3X.2 15.04,4.3 12.14,4.3 11.77,3.93 IC1X.14
XSLEEP1
  Top 0.254: J1X1.!SLP 15.06,17.87 15.57,18.37 R3X1.2 15.04,19.9 12.14,19.9 11.77,19.53 IC1X1.14
XSLEEP2
  Top 0.254: J1X2.!SLP 15.06,33.47 15.57,33.97 R3X2.2 15.04,35.5 12.14,35.5 11.77,35.13 IC1X2.14
XSTEP
  Top 0.254: IC1X.16 14.44,5.33 15.57,6.46 15.69,6.58 16.2,6.58 16.71,6.08 16.71,5.95 16.71,1.38 J1X.STEP
XSTEP1
  Top 0.254: IC1X1.16 14.44,20.93 15.57,22.06 15.69,22.18 16.2,22.18 16.71,21.68 16.71,21.55 16.71,16.98 J1X1.STEP
XSTEP2
  Top 0.254: IC1X2.16 14.44,36.53 15.57,37.66 15.69,37.78 16.2,37.78 16.71,37.28 16.71,37.15 16.71,32.58 J1X2.STEP
XVCP
  Top 0.254: IC1X.6 6.95,5.33 6.8,5.19 6.8,4.93 6.55,4.68 4.53,4.68 C6X.2
XVCP1
  Top 0.254: IC1X1.6 6.95,20.93 6.8,20.79 6.8,20.53 6.55,20.28 4.53,20.28 C6X1.2
XVCP2
  Top 0.254: IC1X2.6 6.95,36.53 6.8,36.39 6.8,36.13 6.55,35.88 4.53,35.88 C6X2.2
XVREG
  Top 0.254: IC1X.8 7.34,3.93 C7X.2
XVREG1
  Top 0.254: IC1X1.8 7.34,19.53 C7X1.2
XVREG2
  Top 0.254: IC1X2.8 7.34,35.13 C7X2.2
YCP1
  Top 0.254: IC1Y.4 26.63,6.33 C5Y.1
YCP2
  Top 0.254: IC1Y.5 27.26,5.83 27.25,5.82 26.63,5.82 C5Y.2
YCP3
  Top 0.254: IC1Y1.4 26.63,21.93 C5Y1.1
YCP4
  Top 0.254: IC1Y1.5 27.26,21.43 27.25,21.42 26.63,21.42 C5Y1.2
YCP5
  Top 0.254: IC1Y2.4 26.63,37.53 C5Y2.1
YCP6
  Top 0.254: IC1Y2.5 27.26,37.03 27.25,37.02 26.63,37.02 C5Y2.2
YDIR1
  Top 0.254: IC1Y.19 33.85,6.83 35.38,8.36 37.03,8.36 37.16,8.23 37.41,7.98 37.54,7.85 37.54,3.15 J1Y.DIR
YDIR2
  Top 0.254: IC1Y1.19 33.85,22.43 35.38,23.96 37.03,23.96 37.16,23.84 37.41,23.58 37.54,23.45 37.54,18.75 J1Y1.DIR
YDIR3
  Top 0.254: IC1Y2.19 33.85,38.03 35.38,39.56 37.03,39.56 37.16,39.44 37.41,39.18 37.54,39.05 37.54,34.35 J1Y2.DIR
YENABLE
  Top 0.254: J1Y.!EN 21.92,1.5 R2Y.2 23.82,7.33 23.96,7.47 27,7.47 27.14,7.33 IC1Y.2
YENABLE1
  Top 0.254: J1Y1.!EN 21.92,17.1 R2Y1.2 23.82,22.93 23.96,23.07 27,23.07 27.14,22.93 IC1Y1.2
YENABLE2
  Top 0.254: J1Y2.!EN 21.92,32.7 R2Y2.2 23.82,38.53 23.96,38.67 27,38.67 27.14,38.53 IC1Y2.2
YMS1
  Top 0.254: IC1Y.9 29.55,3.17 29.28,2.9 28.01,2.9 27.5,2.39 25.34,2.39 J1Y.MS1
YMS2
  Top 0.254: J1Y.MS2 27.12,1.25 28.27,2.39 29.54,2.39 30.04,2.9 30.05,2.91 IC1Y.10
YMS3
  Top 0.254: J1Y.MS3 30.55,2.52 IC1Y.11
YMS4
  Top 0.254: IC1Y1.9 29.55,18.77 29.28,18.5 28.01,18.5 27.5,17.99 25.34,17.99 J1Y1.MS1
YMS5
  Top 0.254: J1Y1.MS2 27.12,16.85 28.27,17.99 29.54,17.99 30.04,18.5 30.05,18.51 IC1Y1.10
YMS6
  Top 0.254: J1Y1.MS3 30.55,18.12 IC1Y1.11
YMS7
  Top 0.254: IC1Y2.9 29.55,34.37 29.28,34.1 28.01,34.1 27.5,33.59 25.34,33.59 J1Y2.MS1
YMS8
  Top 0.254: J1Y2.MS2 27.12,32.45 28.27,33.59 29.54,33.59 30.04,34.1 30.05,34.11 IC1Y2.10
YMS9
  Top 0.254: J1Y2.MS3 30.55,33.72 IC1Y2.11
YOUT1A
  Top 0.254: IC1Y.24 31.05,9.88 31.06,10.01
  Top 0.762: J1Y.1A 31.06,13.19 31.06,10.01
YOUT1A1
  Top 0.254: IC1Y1.24 31.05,25.48 31.06,25.61
  Top 0.762: J1Y1.1A 31.06,28.79 31.06,25.61
YOUT1A2
  Top 0.254: IC1Y2.24 31.05,41.08 31.06,41.21
  Top 0.762: J1Y2.1A 31.06,44.39 31.06,41.21
YOUT1B
  Top 0.254: 32.96,8.11 32.96,7.84 IC1Y.21
  Top 0.762: J1Y.1B 33.6,13.19 33.6,8.74 32.96,8.11
YOUT1B1
  Top 0.254: 32.96,23.71 32.96,23.44 IC1Y1.21
  Top 0.762: J1Y1.1B 33.6,28.79 33.6,24.34 32.96,23.71
YOUT1B2
  Top 0.254: 32.96,39.31 32.96,39.04 IC1Y2.21
  Top 0.762: J1Y2.1B 33.6,44.39 33.6,39.94 32.96,39.31
YOUT2A
  Top 0.254: IC1Y.26 30.05,9.88 30.04,10.01
  Top 0.762: J1Y.2A 30.04,13.19 30.04,10.01
YOUT2A1
  Top 0.254: IC1Y1.26 30.05,25.48 30.04,25.61
  Top 0.762: J1Y1.2A 30.04,28.79 30.04,25.61
YOUT2A2
  Top 0.254: IC1Y2.26 30.05,41.08 30.04,41.21
  Top 0.762: J1Y2.2A 30.04,44.39 30.04,41.21
YREF
  Top 0.254: IC1Y.17 34.44,5.83 T1Y.2
YREF1
  Top 0.254: T1Y.3 38.99,9.97 R1Y.2
YREF2
  Top 0.254: IC1Y1.17 34.44,21.43 T1Y1.2
YREF3
  Top 0.254: T1Y1.3 38.99,25.57 R1Y1.2
YREF4
  Top 0.254: IC1Y2.17 34.44,37.03 T1Y2.2
YREF5
  Top 0.254: T1Y2.3 38.99,41.17 R1Y2.2
YRESET
  Top 0.254: J1Y.!RST 31.05,2.02 IC1Y.12
YRESET1
  Top 0.254: J1Y1.!RST 31.05,17.62 IC1Y1.12
YRESET2
  Top 0.254: J1Y2.!RST 31.05,33.22 IC1Y2.12
YROSC
  Top 0.254: IC1Y.13 31.55,3.17 31.82,2.9 32.82,2.9 R4Y.1
YROSC1
  Top 0.254: IC1Y1.13 31.55,18.77 31.82,18.5 32.82,18.5 R4Y1.1
YROSC2
  Top 0.254: IC1Y2.13 31.55,34.37 31.82,34.1 32.82,34.1 R4Y2.1
YSENSE1
  Top 0.254: IC1Y.23 31.55,9.49 31.95,9.89
  Top 0.508: 31.95,9.89 32.33,10.27 S2Y.2
YSENSE2
  Top 0.254: IC1Y.27 29.55,9.49 29.15,9.89
  Top 0.508: 29.15,9.89 28.77,10.27 S1Y.2
YSENSE3
  Top 0.254: IC1Y1.27 29.55,25.09 29.15,25.49
  Top 0.508: 29.15,25.49 28.77,25.87 S1Y1.2
YSENSE4
  Top 0.254: IC1Y1.23 31.55,25.09 31.95,25.49
  Top 0.508: 31.95,25.49 32.33,25.87 S2Y1.2
YSENSE5
  Top 0.254: IC1Y2.27 29.55,40.69 29.15,41.09
  Top 0.508: 29.15,41.09 28.77,41.47 S1Y2.2
YSENSE6
  Top 0.254: IC1Y2.23 31.55,40.69 31.95,41.09
  Top 0.508: 31.95,41.09 32.33,41.47 S2Y2.2
YSLEEP
  Top 0.254: J1Y.!SLP 35.38,2.27 35.89,2.77 R3Y.2 35.36,4.3 32.46,4.3 32.09,3.93 IC1Y.14
YSLEEP1
  Top 0.254: J1Y1.!SLP 35.38,17.87 35.89,18.37 R3Y1.2 35.36,19.9 32.46,19.9 32.09,19.53 IC1Y1.14
YSLEEP2
  Top 0.254: J1Y2.!SLP 35.38,33.47 35.89,33.97 R3Y2.2 35.36,35.5 32.46,35.5 32.09,35.13 IC1Y2.14
YSTEP
  Top 0.254: IC1Y.16 34.76,5.33 35.89,6.46 36.01,6.58 36.52,6.58 37.03,6.08 37.03,5.95 37.03,1.38 J1Y.STEP
YSTEP1
  Top 0.254: IC1Y1.16 34.76,20.93 35.89,22.06 36.01,22.18 36.52,22.18 37.03,21.68 37.03,21.55 37.03,16.98 J1Y1.STEP
YSTEP2
  Top 0.254: IC1Y2.16 34.76,36.53 35.89,37.66 36.01,37.78 36.52,37.78 37.03,37.28 37.03,37.15 37.03,32.58 J1Y2.STEP
YVCP
  Top 0.254: IC1Y.6 27.27,5.33 27.12,5.19 27.12,4.93 26.87,4.68 24.85,4.68 C6Y.2
YVCP1
  Top 0.254: IC1Y1.6 27.27,20.93 27.12,20.79 27.12,20.53 26.87,20.28 24.85,20.28 C6Y1.2
YVCP2
  Top 0.254: IC1Y2.6 27.27,36.53 27.12,36.39 27.12,36.13 26.87,35.88 24.85,35.88 C6Y2.2
YVREG
  Top 0.254: IC1Y.8 27.66,3.93 C7Y.2
YVREG1
  Top 0.254: IC1Y1.8 27.66,19.53 C7Y1.2
YVREG2
  Top 0.254: IC1Y2.8 27.66,35.13 C7Y2.2

## Text on the board
_tsilk: C1X | S1X | S2X | C4X | C1Y | S1Y | S2Y | C4Y | R1X | R1Y | C3X | Rev 0.1 | C3Y | Rev 0.1 | C2X | C2Y | R2X | C5X | T1X | R2Y | C5Y | T1Y | StepStick | R3X | StepStick | R3Y | C6X | C6Y | C7X | A4988 | C7Y | A4988 | R4X | R4Y | C1X | S1X | S2X | C1Y | S1Y | S2Y | C4X | C4Y | C3X | R1X | C3Y | R1Y | C2X | Rev 0.1 | C2Y | Rev 0.1 | T1X | T1Y | R2X | C5X | R2Y | C5Y | R3X | R3Y | StepStick | StepStick | C6X | C6Y | C7X | A4988 | R4X | C7Y | A4988 | R4Y | C1X | S1X | S2X | C1Y | S1Y | S2Y | C4X | R1X | C4Y | R1Y | C3X | Rev 0.1 | C3Y | Rev 0.1 | C2X | C2Y | R2X | C5X | T1X | R2Y | C5Y | T1Y | R3X | R3Y | C6X | StepStick | C6Y | StepStick | C7X | A4988 | C7Y | A4988 | R4X | R4Y
_bsilk: VMOT | GND | 2B | 2A | 1A | 1B | VDD | GND | VMOT | GND | 2B | 2A | 1A | 1B | VDD | GND | reprap.org/wiki/stepstick | reprap.org/wiki/stepstick | !ENABLE | MS1 | MS2 | MS3 | !RESET | !SLEEP | STEP | DIRECTION | !ENABLE | MS1 | MS2 | MS3 | !RESET | !SLEEP | STEP | DIRECTION | VMOT | GND | 2B | 2A | 1A | 1B | VDD | GND | VMOT | GND | 2B | 2A | 1A | 1B | VDD | GND | reprap.org/wiki/stepstick | reprap.org/wiki/stepstick | !ENABLE | MS1 | MS2 | MS3 | !RESET | !SLEEP | STEP | DIRECTION | !ENABLE | MS1 | MS2 | MS3 | !RESET | !SLEEP | STEP | DIRECTION | VMOT | GND | 2B | 2A | 1A | 1B | VDD | GND | VMOT | GND | 2B | 2A | 1A | 1B | VDD | GND | reprap.org/wiki/stepstick | reprap.org/wiki/stepstick | !ENABLE | MS1 | MS2 | MS3 | !RESET | !SLEEP | STEP | DIRECTION | !ENABLE | MS1 | MS2 | MS3 | !RESET | !SLEEP | STEP | DIRECTION